# Altium PCB PCB_board3.PcbDoc
Units mil, origin at the board's own origin, x right, y up, seen from the top; angles counter-clockwise.
Board outline 3900 x 3900 mil, 2 copper layers (Top Layer, Bottom Layer); 62 components, 45 nets, 259 pads, 84 vias.
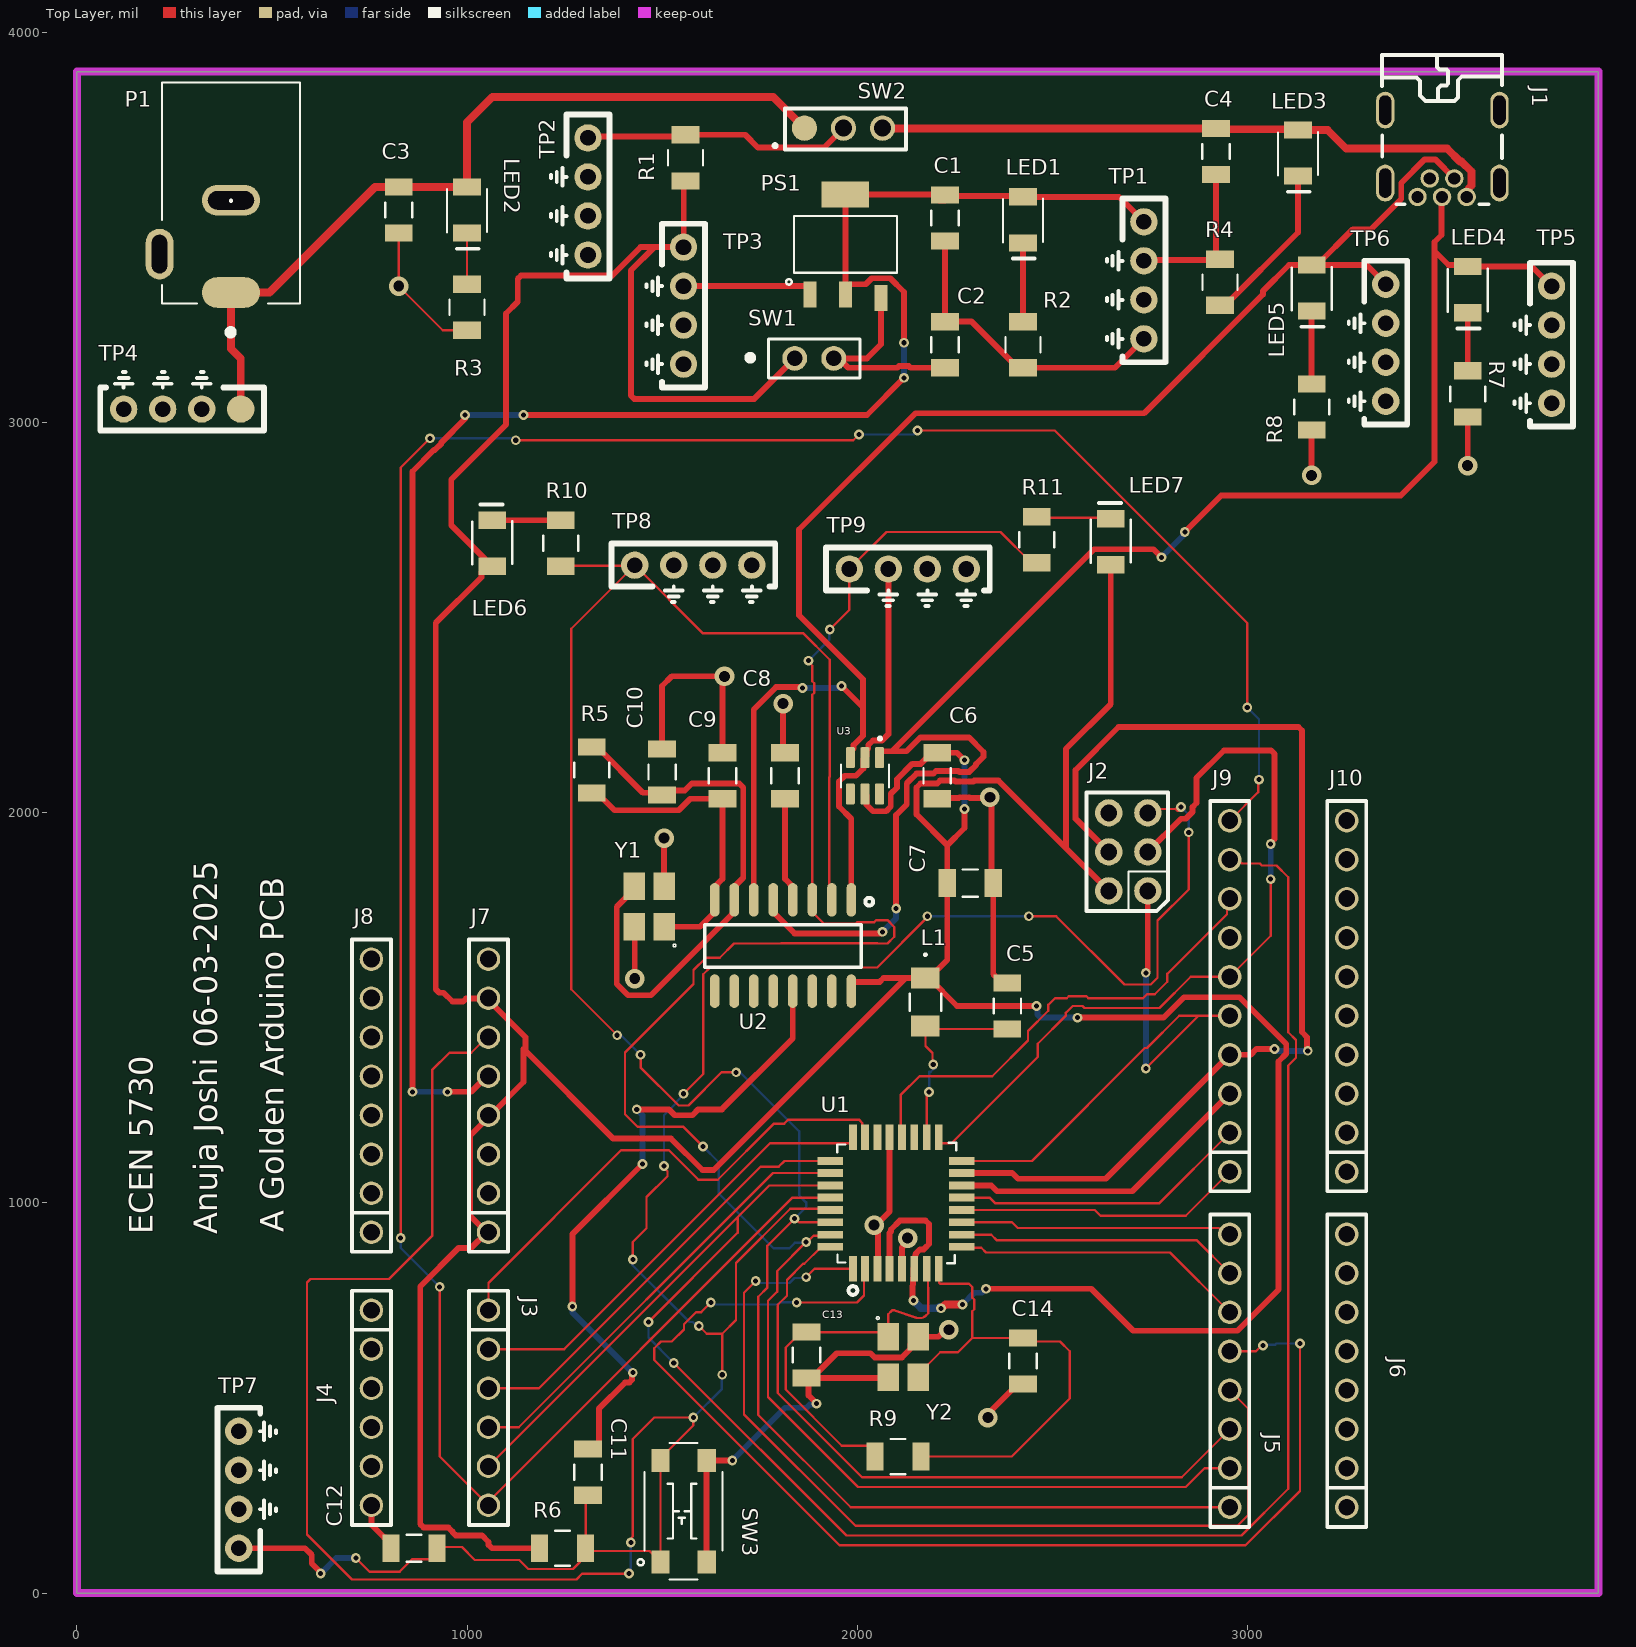
[diagram p0: Top Layer view]
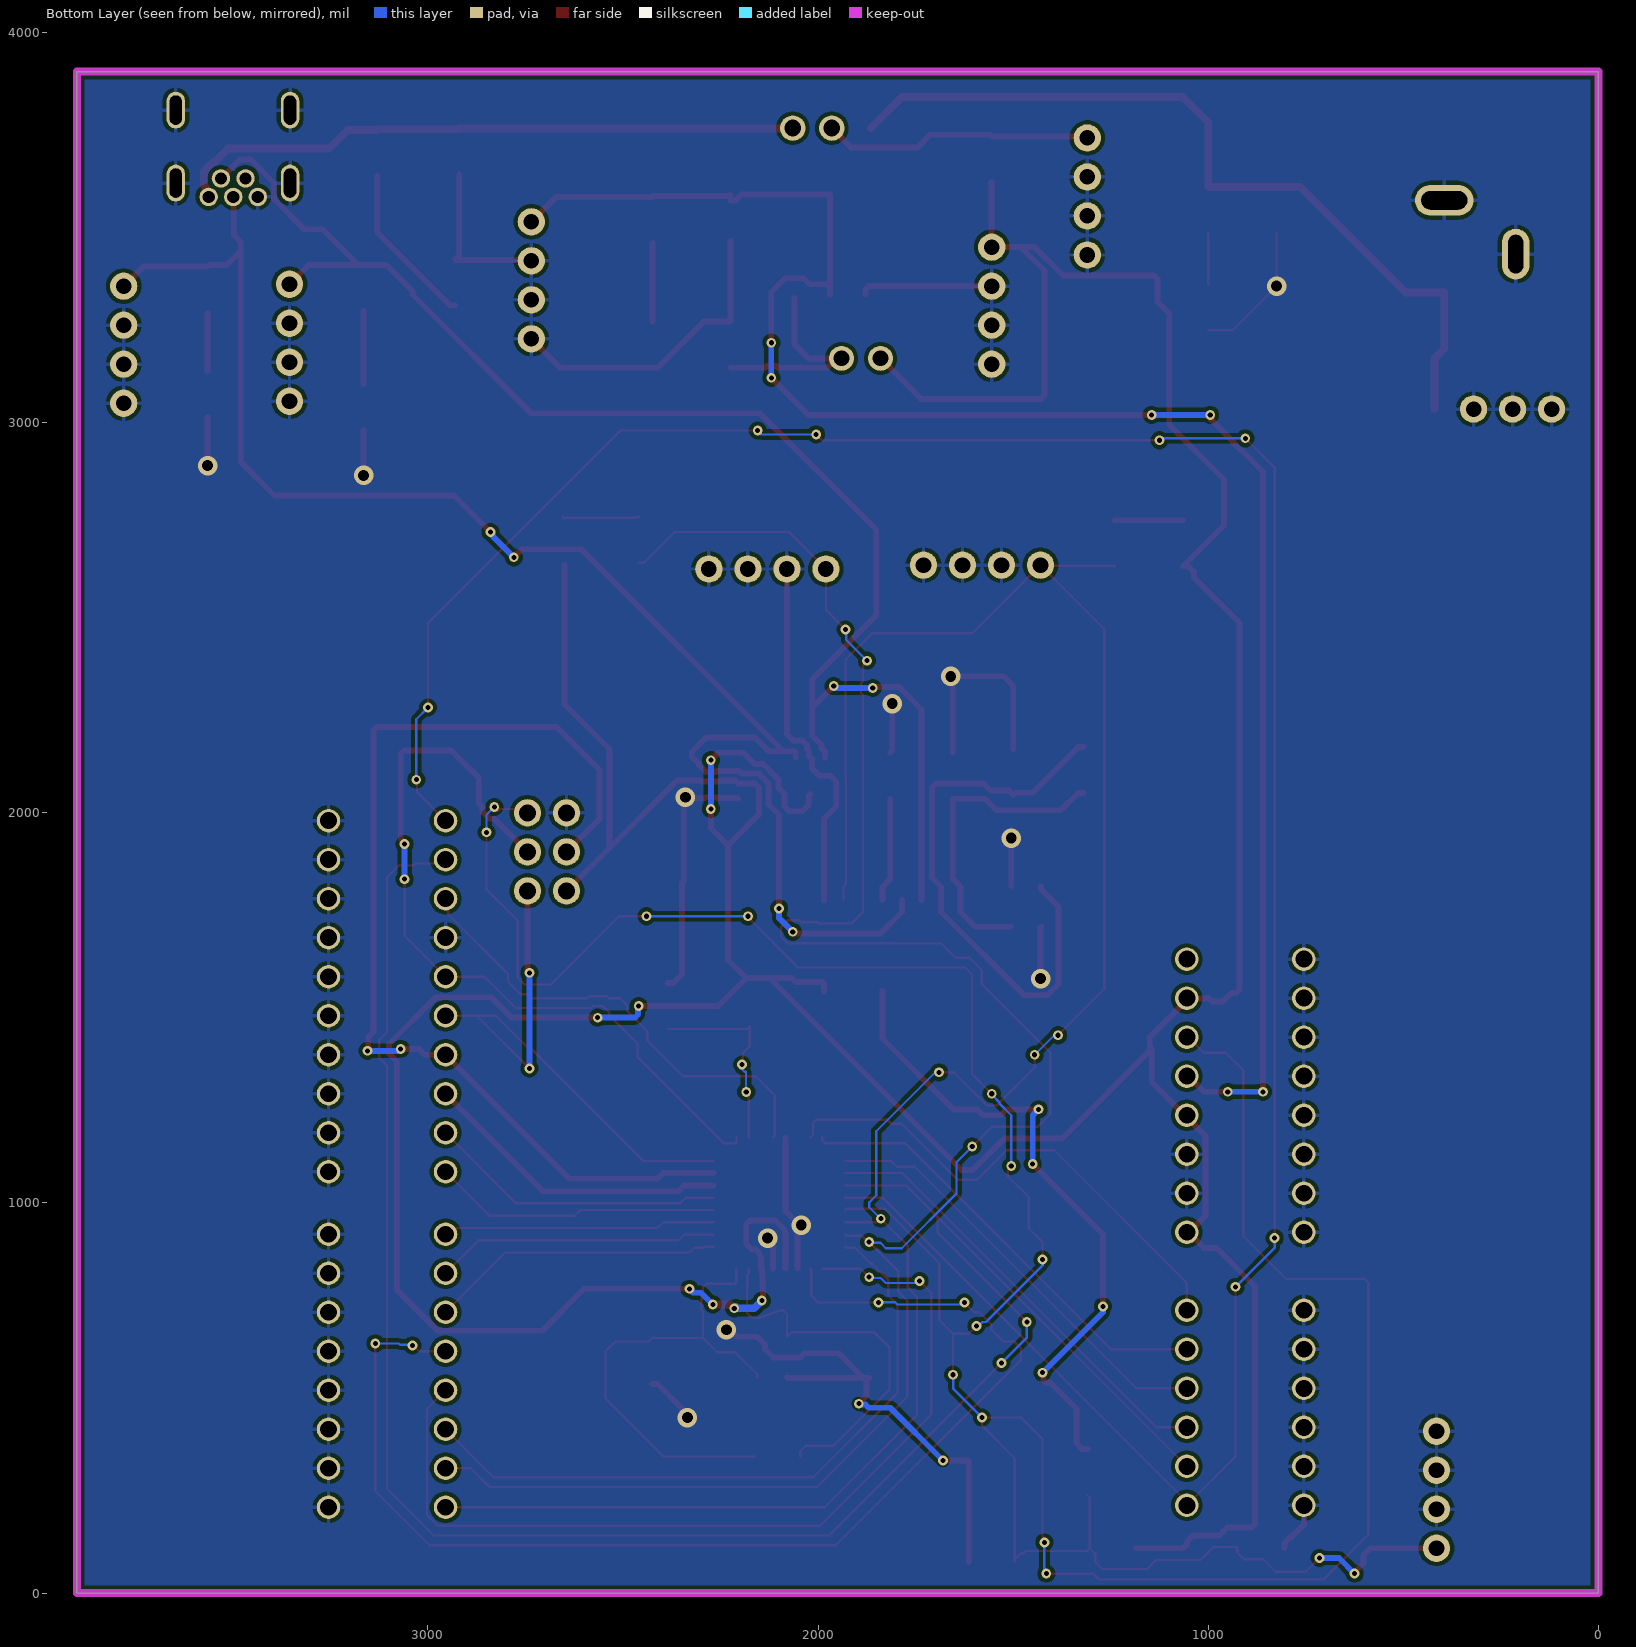
[diagram p1: Bottom Layer view, seen from below]
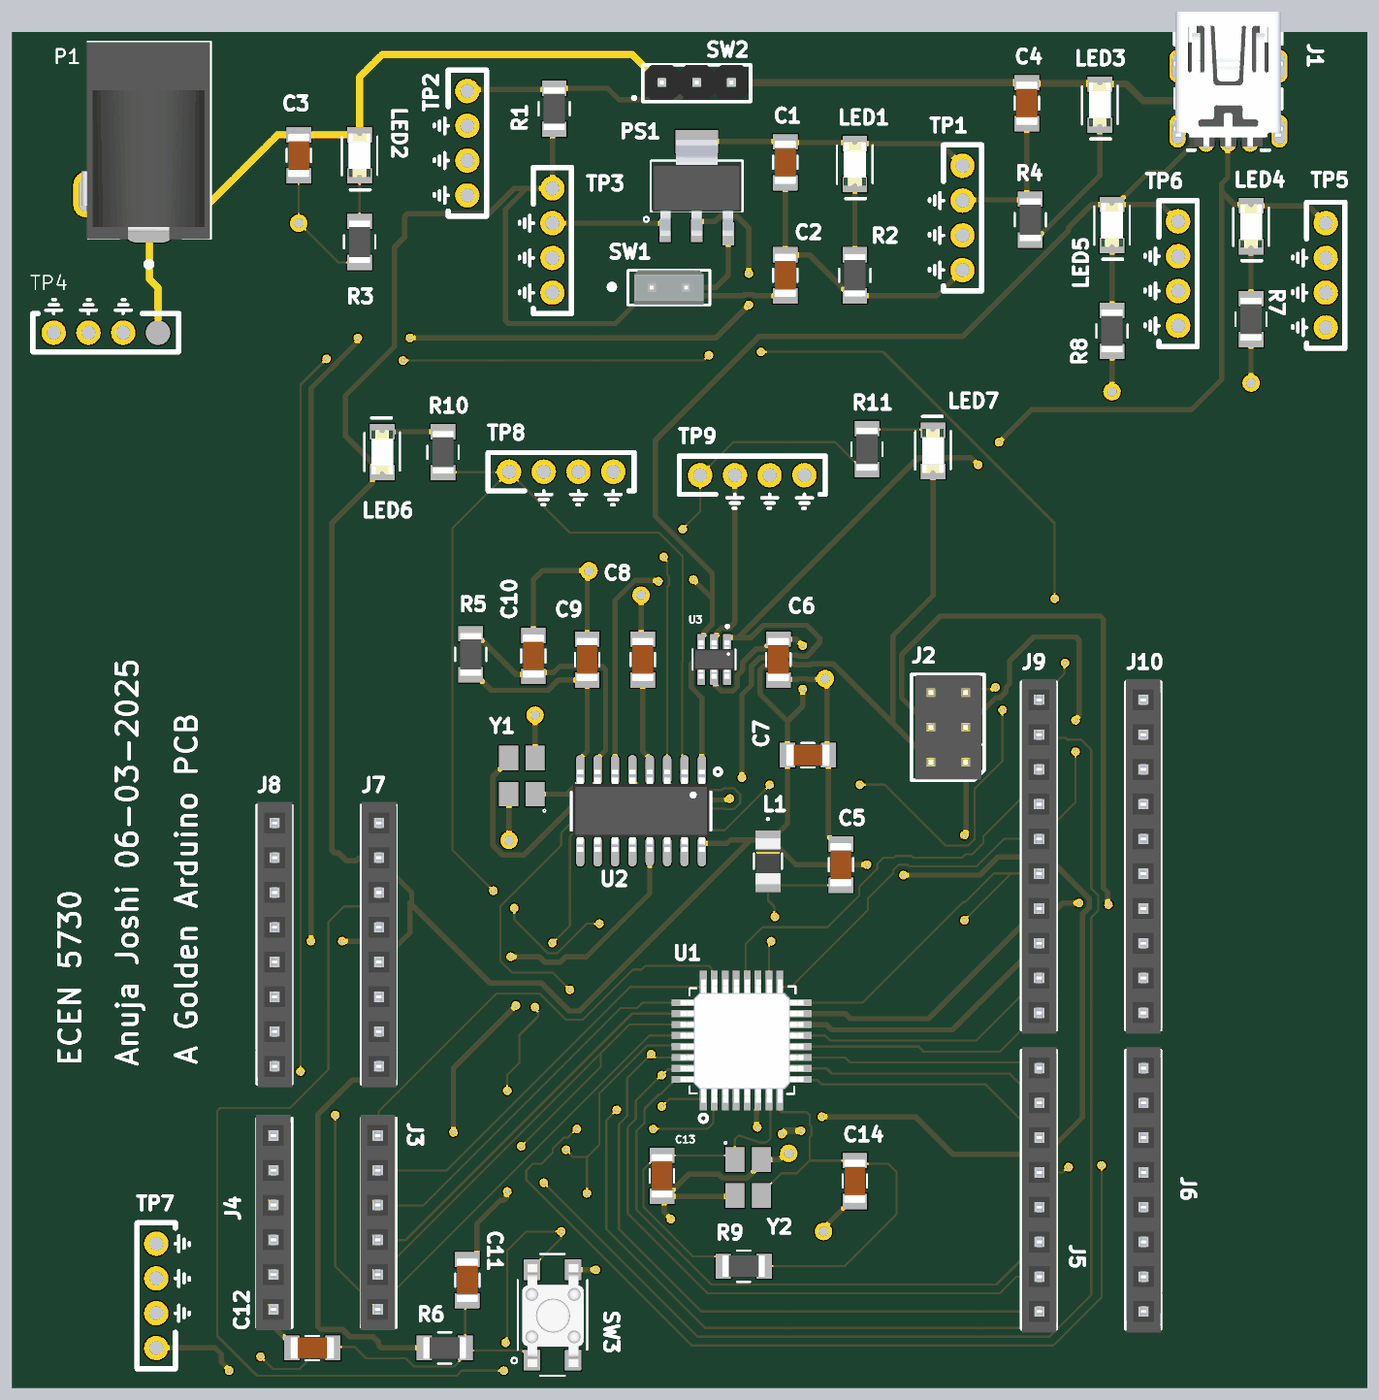
[diagram p2: 3D render of the assembled board from above, using the file's embedded part models]

## Layer stack, top to bottom
Top Solder: solder mask 0.4, Solder Resist, Dk 3.5
Top Layer: signal copper 1.4
Dielectric 1: dielectric 12.6, FR-4, Dk 4.8
Bottom Layer: signal copper 1.4
Bottom Solder: solder mask 0.4, Solder Resist, Dk 3.5

## Board outline
0,0 3900,0 3900,3900 0,3900

## Design rules (kind name [scope] priority, off if disabled: settings)
BoardOutlineClearance [All] p1: gap=10 ignorepadtopadclearanceinfootprint=FALSE except(0: Arc-SplitContinuation Track-SplitContinuation SMDPad-SplitContinuation THPad-SplitContinuation Via-SplitContinuation Fill-SplitContinuation Poly-SplitContinuation Region-SplitContinuation Text-SplitContinuation)
Clearance [All] p1: gap=10 ignorepadtopadclearanceinfootprint=FALSE
PlaneClearance [All] p1: clearance=10
PlaneConnect [All] p1: planeconnectstyle=Direct reliefexpansion=20 reliefentries=4 reliefconductorwidth=10 reliefairgap=10
PolygonConnect [All] p1: thpad.connectstyle=Relief thpad.reliefconductorwidth=10 thpad.reliefentries=4 thpad.polygonreliefangle="90 Angle" thpad.airgapwidth=10 smdpad.connectstyle=Direct smdpad.reliefconductorwidth=10 smdpad.reliefentries=4 smdpad.polygonreliefangle="90 Angle" smdpad.airgapwidth=10 via.connectstyle=Direct via.reliefconductorwidth=10 via.reliefentries=4 via.polygonreliefangle="90 Angle" via.airgapwidth=10
RoutingVias [All] p1: holewidth=13 width=25 viastyle="Through Hole" minholewidth=13 minwidth=25 maxholewidth=60 maxwidth=80
SolderMaskExpansion [All] p1: expansion=4 istentingtop=FALSE
SupplyNets "Schematic Supply Nets_4" [InNet('3.3V')] p1: voltage=0.000
SupplyNets "Schematic Supply Nets_3" [InNet('5V')] p2: voltage=0.000
SupplyNets "Schematic Supply Nets_2" [InNet('5V_USB')] p3: voltage=0.000
SupplyNets "Schematic Supply Nets_1" [InNet('GND')] p4: voltage=0.000
SupplyNets "Schematic Supply Nets" [InNet('5V_power_jack')] p5: voltage=0.000
UnRoutedNet [All] p1: checkbadconnections=TRUE
Width "Schematic Width Constraint_5" [InNet('NetR1_1')] p1: maxlimit=100 minlimit=10 preferedwidth=20 minimp=50.000000 maximp=50.000000 favimp=50.000000
Width "Schematic Width Constraint_4" [InNet('3.3V')] p2: maxlimit=100 minlimit=10 preferedwidth=20 minimp=50.000000 maximp=50.000000 favimp=50.000000
Width "Schematic Width Constraint_3" [InNet('5V_USB')] p3: maxlimit=100 minlimit=10 preferedwidth=20 minimp=50.000000 maximp=50.000000 favimp=50.000000
Width "Schematic Width Constraint_1" [InNet('5V')] p4: maxlimit=100 minlimit=10 preferedwidth=20 minimp=50.000000 maximp=50.000000 favimp=50.000000
Width "Schematic Width Constraint" [InNet('5V_power_jack')] p5: maxlimit=100 minlimit=10 preferedwidth=20 minimp=50.000000 maximp=50.000000 favimp=50.000000
Width [All] p6: maxlimit=100 minlimit=6 preferedwidth=6 minimp=50.000000 maximp=50.000000 favimp=50.000000
27 further rules are at their usual default settings.

## Components (designator, comment, footprint, x,y, rotation, side; value= is the part's Value field where it differs from the comment)
C1 "22uF" 1206_Passive_Capacitor 2225,3525 r90 top
C2 "22uF" 1206_Passive_Capacitor 2225,3200 r270 top
C3 "22uF" 1206_Passive_Capacitor 825,3545 r90 top
C4 "22uF" 1206_Passive_Capacitor 2920,3695 r90 top
C5 "22uF" 1206_Passive_Capacitor 2385,1505 r270 top
C6 "22uF" 1206_Passive_Capacitor 2205,2095 r90 top
C7 "22uF" 1206_Passive_Capacitor 2290,1820 r180 top
C8 "1uF" 1206_Passive_Capacitor 1815,2095 r270 top
C9 "22pF" 1206_Passive_Capacitor 1655,2095 r270 top
C10 "22pF" 1206_Passive_Capacitor 1500,2105 r270 top
C11 "22uF" 1206_Passive_Capacitor 1310,310 r270 top
C12 "1uF" 1206_Passive_Capacitor 864,115 r0 top
C13 "22pF" 1206_Passive_Capacitor 1870,610 r90 top
C14 "22pF" 1206_Passive_Capacitor 2425,595 r90 top
J1 "USB Mini" USB_MINI_B 3500,3690 r180 top value="USB mini B"
J2 "NRPN032PAEN-RC" ICSP 2745,1800 r180 top
J3 "" "6_PIN_100MIL -Female" 1055,725 r270 top value=Female
J4 "" "6_PIN_100MIL -Female" 755,725 r270 top value=Female
J5 "" "8_PIN_100MIL - Female" 2955,220 r90 top value=Female
J6 "" "8_PIN_100MIL - Female" 3255,220 r90 top value=Female
J7 "" "8_PIN_100MIL - Female" 1055,925 r90 top value=Female
J8 "" "8_PIN_100MIL - Female" 755,925 r90 top value=Female
J9 "PPTC101LFBN-RC" "10_PIN_100MIL - Female" 2955,1080 r90 top value=Female
J10 "PPTC101LFBN-RC" "10_PIN_100MIL - Female" 3255,1080 r90 top value=Female
L1 "FB_10uH_1206" AIML-1206_ABR-M 2175,1515 r270 top
LED1 "Blue" LED_1206 2425,3520 r270 top
LED2 "Green" LED_1206 1000,3545 r270 top
LED3 "Blue" LED_1206 3130,3691 r270 top
LED4 "Blue" LED_1206 3565,3341 r270 top
LED5 "Blue" LED_1206 3165,3345 r270 top
LED6 "Blue" LED_1206 1065,2691 r90 top
LED7 "Blue" LED_1206 2650,2695 r90 top
P1 "Power Jack" Power_Jack 395,3333.78 r90 top value="CONN PWR JACK 2X5.5MM SOLDER"
PS1 "AMS1117-3.3" LDO 1970,3457.05 r0 top value="IC REG LINEAR 3.3V 800MA SOT223"
R1 "500m" 1206_Passive_Resitor 1560,3679 r270 top value=500mOhm
R2 "1k" 1206_Passive_Resitor 2425,3200 r90 top value="1K Ohm"
R3 "1k" 1206_Passive_Resitor 1000,3296 r90 top value="1K Ohm"
R4 "1k" 1206_Passive_Resitor 2930,3360 r270 top value="1K Ohm"
R5 "1M" 1206_Passive_Resitor 1320,2110 r90 top value="1M Ohm"
R6 "10k" 1206_Passive_Resitor 1245,115 r180 top value=10KOhm
R7 "1k" 1206_Passive_Resitor 3565,3074 r90 top value="1K Ohm"
R8 "1k" 1206_Passive_Resitor 3165,3040 r90 top value="1K Ohm"
R9 "1M" 1206_Passive_Resitor 2105,350 r0 top value="1M Ohm"
R10 "1k" 1206_Passive_Resitor 1240,2691 r90 top value="1K Ohm"
R11 "1k" 1206_Passive_Resitor 2460,2700 r90 top value="1K Ohm"
SW1 "SW_2Pin_100mil_Switch" 2Pin-Header-Conn 1840,3165 r0 top
SW2 "PREC003SAAN-RC" 3_PIN_100mil 1865,3755 r0 top value="CONN HEADER VERT 3POS 2.54MM"
SW3 "TL3305AF160QG" Switch_JLC 1555,210 r90 top
TP1 "" TP10x_Probe#1 2735,3365 r270 top
TP2 "" TP10x_Probe#1 1310,3580 r270 top
TP3 "" TP10x_Probe#1 1555,3300 r270 top
TP4 "TP_5V" TP10x_Probe#2 270,3035 r180 top
TP5 "10x Probe TP" TP10x_Probe#1 3780,3200 r270 top
TP6 "10x Probe TP" TP10x_Probe#1 3355,3205 r270 top
TP7 "10x Probe TP" TP10x_Probe#1 415,265 r90 top
TP8 "10x Probe TP" TP10x_Probe#1 1580,2635 r0 top
TP9 "10x Probe TP" TP10x_Probe#1 2130,2625 r0 top
U1 "ATMEGA328P-ANR" ATMega328P 2099.25,999.75 r270 top value="IC MCU 8BIT 32KB FLASH 32TQFP"
U2 "CH340G" "USB to serial" 1810,1660 r180 top value="USB to Serial"
U3 "TESD5V0V4UCX6_RFG" SOT95P280X145-6N 2020,2095 r270 top
Y1 "X322512MSB4SI" "Crystal resonator" 1465,1760 r90 top value=12MHz
Y2 "X322516MLB4SI" "Crystal resonator" 2120,605 r270 top value=16MHz

## Footprints (in the part's own frame and the unit in brackets; to place one, negate y for a bottom-side part, rotate by r counter-clockwise, add the part's x,y. Pads: shape width x height; smd on the part's side, far side on the other; paste and mask are expansions set on the pad)
2Pin-Header-Conn [mm]
  round 1.62 hole 1.02: 1(0,0) 2(2.54,0)
  silkscreen extent -3.02,-1.27 4.26,1.26, body extent -1.27,-1.27 3.81,1.27, height 8.13
3_PIN_100mil [mm]
  round 1.65 smd: 1(0,0)
  round 1.65 hole 1.1: 2(2.54,0) 3(5.08,0)
  silkscreen extent -2,-1.4 6.6,1.27, body extent -1.14,-1.27 6.48,1.27, height 8.38
"6_PIN_100MIL -Female" [mil]
  round 60 hole 43.31: 1(0,0) 2(100,0) 3(200,0) 4(300,0) 5(400,0) 6(500,0)
  silkscreen extent -50,-50 550,50, body extent -61,-53 559,47, height 335
"8_PIN_100MIL - Female" [mil]
  round 60 hole 43.31: 1(0,0) 2(100,0) 3(200,0) 4(300,0) 5(400,0) 6(500,0) 7(600,0) 8(700,0)
  silkscreen extent -50,-50 750,50, body extent -60,-51 760,49, height 335
"10_PIN_100MIL - Female" [mil]
  round 60 hole 43.31: 1(0,0) 2(100,0) 3(200,0) 4(300,0) 5(400,0) 6(500,0) 7(600,0) 8(700,0) 9(800,0) 10(900,0)
  silkscreen extent -50,-50 950,50, body extent -61,-50 959,50, height 335
1206_Passive_Capacitor [mil]
  rect 44x71 smd: 1(-59,0) 2(59,0)
  silkscreen extent -19,-35 19,35, body extent -63,-31 63,32, height 50
1206_Passive_Resitor [mil]
  rect 44x71 smd: 1(-59,0) 2(59,0)
  silkscreen extent -19,-45 19,45, body extent -61,-31 61,31, height 26
AIML-1206_ABR-M [mil]
  rect 54x73 smd paste+0 mask+0: 1(-61.5,0) 2(61.5,0)
  silkscreen extent -124,-41 22,41, body extent -66,-36 66,36, height 55
ATMega328P [mm]
  rect 1.65x0.508 smd mask+0.025: 1(4.28,-2.794) 2(4.28,-2.007) 3(4.28,-1.194) 4(4.28,-0.406) 5(4.28,0.406) 6(4.28,1.194) 7(4.28,2.007) 8(4.28,2.794) 17(-4.28,2.794) 18(-4.28,2.007) 19(-4.28,1.194) 20(-4.28,0.406) 21(-4.28,-0.406) 22(-4.28,-1.194) 23(-4.28,-2.007) 24(-4.28,-2.794)
  rect 0.508x1.65 smd mask+0.025: 9(2.843,4.28) 10(2.056,4.28) 11(1.243,4.28) 12(0.455,4.28) 13(-0.357,4.28) 14(-1.145,4.28) 15(-1.958,4.28) 16(-2.745,4.28) 25(-2.745,-4.28) 26(-1.958,-4.28) 27(-1.145,-4.28) 28(-0.357,-4.28) 29(0.455,-4.28) 30(1.243,-4.28) 31(2.056,-4.28) 32(2.843,-4.28)
  silkscreen extent -3.94,-3.81 5.97,3.94, body extent -4.45,-4.47 4.55,4.53, height 1.16
"Crystal resonator" [mm]
  rect 1.8x1.4 smd: 1(-1.32,-1.02) 2(1.32,-1.02) 3(1.32,0.92) 4(-1.32,0.92)
  silkscreen extent -2.63,-1.79 -2.45,-1.61, body extent -1.65,-1.2 1.65,1.2, height 0.8
ICSP [mil]
  round 70 hole 43.31: 1(0,0) 2(0,-100) 3(0,-200) 4(100,0) 5(100,-100) 6(100,-200)
  silkscreen extent -52,-252 157,52, body extent -44,-250 146,50, height 330
LDO [mm]
  rect 0.838x1.7 smd: 1(-2.311,-3.25) 2(0,-3.25) 3(2.311,-3.5)
  rect 3.099x1.7 smd: 4(0,3.25)
  silkscreen extent -3.86,-2.62 3.35,1.85, body extent -3.25,-3.65 3.25,3.35, height 1.85
LED_1206 [mil]
  rect 44x71 smd: 1(-59,0) 2(59,0)
  silkscreen extent -54,-51 99,51, body extent -63,-31 63,31, height 28
Power_Jack [mm]
  oval 2x3.8 smd: 1(0,0)
  oval 2x3.8 hole 1.2 slot 3 at 90 deg: 2(6,0)
  oval 3.3x1.8 hole 1 slot 2.5 at 0 deg: 3(2.5,4.65)
  silkscreen extent -2.79,-4.5 13.68,4.5, body extent -0.76,-4.45 13.64,4.95, height 11.49
SOT95P280X145-6N [mm]
  rrect25% 1.35x0.58 smd: 1(-1.185,0.95) 2(-1.185,0) 3(-1.185,-0.95) 4(1.185,-0.95) 5(1.185,0) 6(1.185,0.95)
  silkscreen extent -2.52,-1.57 0.75,1.57, body extent -1.4,-1.45 1.4,1.45, height 1.45
Switch_JLC [mm]
  rect 1.5x1.2 smd: 1(-3.3,1.5) 2(3.3,1.5) 3(-3.3,-1.5) 4(3.3,-1.5)
  silkscreen extent -4.44,-2.54 4.45,3, body extent -3.8,-2.29 3.7,2.21, height 3.7
TP10x_Probe#1 [mil] "Small Probs footprint"
  round 70 hole 40: 1(-150,0) 2(-50,0) 2(50,0) 2(150,0)
  silkscreen extent -210,-95 210,55
TP10x_Probe#2 [mil] "Small Probs footprint"
  round 70 smd: 1(-150,0)
  round 70 hole 40: 2(-50,0) 2(50,0) 2(150,0)
  silkscreen extent -210,-95 210,55
"USB to serial" [mil]
  oval 24x86.61 smd: 1(-175,-117) 2(-125,-117) 3(-75,-117) 4(-25,-117) 5(25,-117) 6(75,-117) 7(125,-117) 8(175,-117) 9(175,117) 10(125,117) 11(75,117) 12(25,117) 13(-25,117) 14(-75,117) 15(-125,117) 16(-175,117)
  silkscreen extent -231,-122 201,56, body extent -197,-118 197,118, height 71
USB_MINI_B [mm]
  round 1.2 hole 0.8: 1(-1.58,2.826) 2(-0.78,1.622) 3(0.02,2.826) 4(0.82,1.622) 5(1.62,2.826)
  oval 1.2x2.4 hole 0.8 slot 1.9 at 90 deg: 6(-3.72,1.924) 7(3.72,1.924) 8(-3.72,-2.826) 9(3.72,-2.826)
  silkscreen extent -3.89,-6.42 3.93,3.3, body extent -4.04,-6.83 4.06,3.02, height 3.98

## Part data
C1 C2 C3 C4 C5 C6 C7 C11: library part C_22uF_1206, "22uF ±10% 25V X5R 1206 Multilayer Ceramic Capacitors MLCC - SMD/SMT RoHS", LCSC Part#=C12891, MFR Part #=CL31A226KAHNNNE, Datasheet=https://datasheet.lcsc.com/lcsc/1811031514_Samsung-Electro-Mechanics-CL31A226KAHNNNE_C12891.pdf, Type=basic
C8 C12: library part C_1uF_1206, "MULTILAYER CERAMIC CAPACITORS MLCC - SMD/SMT 1UF 50V 1206 ROHS", LCSC Part#=C1848, MFR Part #=CL31B105KBHNNNE, Digikey Link=https://www.digikey.com/product-detail/en/C1206C105M4RACTU/399-8150-1-ND/3471873/?itemSeq=304982366, Type=Basic
C9 C10 C13 C14: library part C_22pF_1206, "22pF ±5% 1kV C0G 1206 Multilayer Ceramic Capacitors MLCC - SMD/SMT RoHS", LCSC Part#=C107174, MFR Part #=CC1206JKNPOCBN220, Datasheet=https://datasheet.lcsc.com/lcsc/1810241219_YAGEO-CC1206JKNPOCBN220_C107174.pdf, Type=Extended
J1: library part J_USB_B_Mini, "Through Hole USB Connectors RoHS", LCSC Part#=C46398, MFR Part #=920-462A2021D10102, Datasheet=https://datasheet.lcsc.com/szlcsc/2103081233_Jing-Extension-of-the-Electronic-Co-920-462A2021D10102_C46398.pdf, Type=Extended
J2: library part J_ICSP, "Connector Header Through Hole 6 position 0.079\" (2.00mm)", LCSC Part#=C124384, Digikey Link=https://www.digikey.com/product-detail/en/NRPN032PAEN-RC/S5801-03-ND/804955/?itemSeq=304982355, MFR Part #=NRPN032PAEN-RC, Type=Extended
J3 J4: library part JF_6_PIN_FEMALE, "6 Position Header Connector 0.100\" (2.54mm) Through Hole Tin", LCSC Part#=C40877, MFR Part #=PPTC061LFBN-RC, Digikey Link=https://www.digikey.com/product-detail/en/PPTC061LFBN-RC/S7004-ND/810145/?itemSeq=304982353, Type=Extended
J5 J6 J7 J8: library part JF_8_PIN_FEMALE, "8 Position Header Connector 0.100\" (2.54mm) Through Hole Tin", LCSC Part#=C27438, MFR Part #=PPTC081LFBN-RC, Digikey Link=https://www.digikey.com/product-detail/en/PPTC081LFBN-RC/S7006-ND/810147/?itemSeq=304982354, Type=Extended
J9 J10: library part JF_10_PIN_FEMALE_, "10 Position Header Connector 0.100\" (2.54mm) Through Hole Tin", LCSC Part#=C225507, Digikey Link=https://www.digikey.com/product-detail/en/PPTC101LFBN-RC/S7008-ND/810149/?itemSeq=304982352, MFR Part #=PPTC101LFBN-RC, Type=Extended
L1: "25mA 10uH ±10% 800mΩ 1206  Inductors (SMD) ROHS", LCSC Part#=C1051, MFR Part #=CMI321609X100KT, Mfr_Name="FH (Guangdong Fenghua Advanced Tech)", Datasheet=https://datasheet.lcsc.com/lcsc/1810311314_FH--Guangdong-Fenghua-Advanced-Tech-CMI321609X100KT_C1051.pdf, Type=Basic
LED1 LED3 LED4 LED5 LED6 LED7: library part LED_BLUE_1206, "blue 1206  Light Emitting Diodes (LED) ROHS", LCSC Part#=C130717, MFR Part #=NCD1206B1, Datasheet=https://datasheet.lcsc.com/lcsc/2008201033_Foshan-NationStar-Optoelectronics-NCD1206B1_C130717.pdf, Type=Extended
LED2: library part LED_GREEN_1206, "Green 513~528nm 1206 Light Emitting Diodes (LED) RoHS", LCSC Part#=C434439, MFR Part #=SZYY1206G, Datasheet=https://datasheet.lcsc.com/lcsc/2006301532_Yongyu-Photoelectric-SZYY1206G_C434439.pdf, Type=Extended
P1: library part "P_Power Jack", "Power Barrel Connector Jack 2.10mm ID (0.083\"), 5.50mm OD (0.217\") Through Hole, Right Angle", LCSC Part#=C136744, MFR Part #=PJ-102A, Digikey Link=https://www.digikey.com/product-detail/en/PJ-102A/CP-102A-ND/275425/?itemSeq=304982367, Type=Extended
PS1: library part PS_AMS_LDO_3v3, "LOW DROPOUT REGULATORS(LDO) POSITIVE FIXED 1.3V @ 800MA 15V 3.3V 1A SOT-223 ROHS", LCSC Part#=C6186, MFR Part #=AMS1117-3.3, Type=Basic
R1: library part R_500mOhm_1206, "Resistors/Shunt 250mW 500mΩ ±800ppm/℃ ±5% 1206  Current Sense  Resistors ROHS", LCSC Part#=C247433, MFR Part #=1206W4J050KT5E, Datasheet=https://datasheet.lcsc.com/lcsc/1810301438_UNI-ROYAL-Uniroyal-Elec-1206W4J050KT5E_C247433.pdf, Type=Extended
R2 R3 R4 R7 R8 R10 R11: library part R_1K_1206, "CHIP RESISTOR - SURFACE MOUNT 1KOHMS ±1% 1/4W 1206 ROHS", LCSC Part#=C4410, MFR Part #=RNCP1206FTD1K00CT, Digikey Link=https://www.digikey.com/product-detail/en/RNCP1206FTD1K00/RNCP1206FTD1K00CT-ND/2240675/?itemSeq=304982373, Type=Basic
R5 R9: library part R_1M_1206, "CHIP RESISTOR - SURFACE MOUNT 1MOHMS ±1% 1/4W 1206 ROHS", LCSC Part#=C17927, MFR Part #=RMCF1206JT1M00, Digikey Link=https://www.digikey.com/product-detail/en/RMCF1206JT1M00/RMCF1206JT1M00CT-ND/1942830/?itemSeq=304982358, Type=Basic
R6: library part R_10KOhm_1206, "10 kOhms ±5% 0.25W, 1/4W Chip Resistor 1206 (3216 Metric) Automotive AEC-Q200 Thick Film", LCSC Part#=C17902, MFR Part #=RMCF1206FT10K0, Digikey Link=https://www.digikey.com/en/products/detail/stackpole-electronics-inc/RMCF1206FT10K0/1759669, Type=Basic
SW1: "2Pin Header", LCSC Part#=C124375, Type=Extended
SW2: library part SW_3Pin_100mil_Switch, "Connector Header Through Hole 3 position 0.100\" (2.54mm)", LCSC Part#=C49257, Digikey Link=https://www.digikey.com/product-detail/en/PREC003SAAN-RC/S1012EC-03-ND/2774851/?itemSeq=304982371, MFR Part #=PREC003SAAN-RC, Type=Extended
SW3: library part SW_Push_Button_JLC, "Tactile Switch SPST-NO Top Actuated Surface Mount", LCSC Part#=C2837550, MFR Part #=KH-4.5X4.5X4.3H-STM, Datasheet=https://datasheet.lcsc.com/lcsc/2106081532_Shenzhen-Kinghelm-Elec-KH-4.5X4.5X4.3H-STM_C2837550.pdf, Type=Extended
TP1 TP2 TP3 TP4 TP5 TP6 TP7 TP8 TP9: library part TP_10x_Probe, "Test Point 300 mil centers"
U1: library part U_ATMega328P, "AVR AVR® ATmega Microcontroller IC 8-Bit 20MHz 32KB (16K x 16) FLASH 32-TQFP (7x7)", LCSC Part#=C14877, MFR Part #=ATMEGA328P-AU, Digikey Link=https://www.digikey.com/product-detail/en/ATMEGA328P-ANR/ATMEGA328P-ANRCT-ND/2774230/?itemSeq=304982365, Type=Basic
U2: library part U_USBtoSerial, "Transceiver USB 2.0 2Mbps SOP-16_150mil USB ICs RoHS", LCSC Part#=C14267, Datasheet=https://datasheet.lcsc.com/lcsc/2008191806_WCH-Jiangsu-Qin-Heng-CH340G_C14267.pdf, MFR Part #=CH340G, Type=Basic
U3: "SOT-26, 5V, 75W, 0.6pF, ESD Protection", Package=None, Check_prices=https://www.snapeda.com/parts/TESD5V0V4UCX6%20RFG/Taiwan+Semiconductor/view-part/?ref=eda, MF="Taiwan Semiconductor", MP="TESD5V0V4UCX6 RFG", SnapEDA_Link=https://www.snapeda.com/parts/TESD5V0V4UCX6%20RFG/Taiwan+Semiconductor/view-part/?ref=snap
Y1: library part X_12MHz_Res, "SMD Crystal Resonators 12MHz ±10ppm SMD-3225_4P RoHS", LCSC Part#=C9002, Datasheet=https://datasheet.lcsc.com/szlcsc/Yangxing-Tech-X322512MSB4SI_C9002.pdf, MFR Part #=X322512MSB4SI, Type=Basic
Y2: library part X_16Mhz_Res, "±10ppm 16000000Hz -40℃~85℃ 贴片无源晶振 60Ω 9pF SMD3225-4P Crystals ROHS", LCSC Part#=C13738, MFR Part #=X322516MLB4SI, Type=Basic

## Via types
v1: diameter 25, hole 13, Top Layer to Bottom Layer, 72 vias
v2: diameter 50, hole 28, Top Layer to Bottom Layer, 12 vias

## Nets (pads, with @x,y where several pads share a name; then routed paths per layer and width w, separated by ;. In a path a pad name is that pad's centre, name@x,y a point inside that pad or via, vN(x,y) a via of type N, cw(c..) or ccw(c..) an arc to the next point about the centre after c; other vN are vias at no path point)
3.3V: C1.2 J7.5 LED1.1 PS1.2 PS1.4 TP1.1 | length 4621.5
  Top Layer w15: v1(860,1285) 860,2875 915,2930 917.43,2930 935,2947.57 935,2950 995,3010 v1(995,3020) ; v1(950,1285) 1010.75,1285 1050.75,1325 J7.5 ; v1(1145,3020) 2025,3020 v1(2120,3115) ; PS1.2 PS1.2@1970,3346.06 ; v1(2120,3205) 2120,3334.97 2084.75,3370.22 2037.25,3370.22 2022.09,3355.06 1979,3355.06 PS1.2@1970,3346.06 ; C1.2@2225,3570 2211.5,3570 2196.5,3585 PS1.4 PS1.2@1970,3346.06 ; C1.2 2227.5,3581.5 2422.5,3581.5 LED1.1 2671,3579 TP1.1
  Bottom Layer w15: v1(860,1285) v1(950,1285) ; v1(995,3020) v1@1147.93,3020 ; v1(2120,3115) v1(2120,3205)
5V: C6.2 C7.2 J2.4 J7.1 J7.4 J7.7 L1.1 LED6.1 LED7.1 R1.2 R6.2 SW1.1 TP3.1 U1.4 U1.6 U2.16 U3.5 | length 12809.1
  Top Layer w15: J7.1 J7.1@1050,925 ; 1150,1395 1150,1425 1055,1520 J7.7 1053.7,1523.7 997.5,1523.7 990,1516.2 962.59,1516.2 940,1538.79 928.79,1538.79 920,1547.57 920,2487 1037,2604 1037,2617.5 1051.5,2632 LED6.1 959.65,2737.35 959.65,2854.71 1100,2995.06 1100,3280 1130,3310 1130,3368.71 1138.79,3377.5 1372.14,3377.5 1444.64,3450 1480,3450 ; R6.2 1063.79,115 1055,123.79 1055,131.21 1038.21,148 971.29,148 962.5,156.79 962.5,157.75 952.25,168 888.79,168 880,176.79 880,786.21 978.79,885 1010.75,885 1050,924.25 J7.1@1050,925 ; TP3.1 1480,3450 ; TP3.1@1555.4,3450.4 R1.2@1555.4,3617.23 ; SW1.1 1736.21,3061.21 1428.79,3061.21 1420,3070 1420,3390 1480,3450 ; U2.16 1985,1562.65 1989.16,1566.81 2058.12,1566.81 2067.81,1576.5 2124.56,1576.5 ; U3.5 2023.92,2044.43 2023.92,2020.76 2040.41,2004.27 2074.4,2004.27 2086.32,2016.2 2086.32,2048.82 2102,2064.5 2102,2085.96 2141.54,2125.5 2163,2125.5 2191.5,2154 C6.2 2256,2154 v1(2275,2135) ; U1.4 2083.25,923 2086.75,926.5 2086.75,932.25 2109.25,954.75 2175.46,954.75 2184.25,945.97 2184.25,894.75 2175.9,886.41 2170.73,881.23 2161,881.23 2150.75,870.98 2146.25,856.75 U1.6 2143.75,831.45 2142.75,791.52 2141.75,785.72 2141.75,752.25 v1(2144.25,749.75) ; v1(2275,2010) 2275,1961.12 2231,1917.12 ; v1(2330,780) 2599.94,780 2707.44,672.5 2974.68,672.5 3080,777.82 3080,1362.57 3100,1382.57 3100,1407.43 2979.93,1527.5 2837.86,1527.5 2785.36,1475 v1(2565,1475) ; v1(2460,1505) 2256,1505 L1.1@2184.5,1576.5 ; J2.4 2535,1910 ; LED7.1 2650,2278.63 2535,2163.63 2535,1910 ; J7.1@1050,925 1007.5,967.5 1007.5,1172.5 1055,1220 J7.4 1060,1225 1145,1310 1145,1395 1375,1165 1522.78,1165 1603.42,1084.37 1632.43,1084.37 2124.56,1576.5 ; 2124.56,1576.5 L1.1 L1.1@2184.5,1576.5 ; L1.1@2184.5,1576.5 2231,1623 C7.2 2231,1917.12 ; 2231,1917.12 2152,1996.12 2152,2065.25 2162.25,2075.5 2205.36,2075.5 2212.36,2082.5 2249.72,2082.5 2252.22,2080 2297.78,2080 2300.28,2082.5 2362.5,2082.5 2535,1910
  Top Layer w20: v1(2215,730.07) 2216.35,730.07 2226.28,740 v1(2270,740)
  Bottom Layer w15: v1(2270,740) 2300,770 2320,770 v1(2330,780) ; v1(2275,2010) v1(2275,2135) ; v1(2460,1505) 2461.91,1503.09 2461.91,1483.09 2470,1475 v1(2565,1475)
  Bottom Layer w20: v1(2144.25,749.75) 2163.93,730.07 v1@2211.36,730.07 ; v1@2211.36,733.7 v1(2215,730.07)
5V_power_jack: C3.2 LED2.1 P1.1 SW2.1 TP4.1 | length 2117.1
  Top Layer w20: TP4.1 420,3164.4 395,3189.4 P1.1 493.78,3333.78 764,3604 C3.2 LED2.1 1000,3770 1065,3835 1785,3835 SW2.1
5V_USB: C4.2 J1.1 LED3.1 SW2.3 | length 1624.3
  Top Layer w20: SW2.3@2066,3754 C4.2 2922,3752 3128,3752 LED3.1 3206.14,3750 3253.64,3702.5 3512.51,3702.5 3545.25,3669.76 3548.78,3669.76 3574.34,3644.2 3574.34,3608.07 3567.42,3601.15 3567.42,3583.96 J1.1
A0: J3.1 U1.23 | length 1307.7
  Top Layer w6: J3.1 1055,795 1395,1135 1517.43,1135 1593.06,1059.37 1642.78,1059.37 1786.9,1203.48 1812.91,1203.48 1823.16,1213.74 2004.63,1213.74 2013.25,1205.12 2013.25,1175.26 U1.23
A1: J3.2 U1.24 | length 1163.8
  Top Layer w6: J3.2 1248.93,625 1777.44,1153.5 1982.25,1153.5 1989.25,1160.5 U1.24
A2: J3.3 U1.25 | length 1117.2
  Top Layer w6: J3.3 1184.29,525 1752.36,1093.07 1798.72,1093.07 1813.47,1107.82 U1.25
A3: J3.4 U1.26 | length 1145.7
  Top Layer w6: J3.4 1132.37,425 1784.2,1076.82 U1.26
A4/SDA: J3.5 J9.9 U1.27 | length 5230.4
  Top Layer w6: J3.5 1694,964 ; v1(1465,695) 1694,924 1694,964 ; v1(1530,590) 1972.5,147.5 2985.03,147.5 3105,267.47 3105,1352.22 3125,1372.22 3125,1417.78 3105,1437.78 3105,1835 3075,1865 3037.22,1865 3032.22,1870 2986.29,1870 2984.9,1871.39 2963.61,1871.39 J9.9 ; U1.27 1774.82,1044.82 1694,964
  Bottom Layer w6: v1(1465,695) 1465,655 v1(1530,590)
A5/SCL: J3.6 J9.10 U1.28 | length 6928.8
  Top Layer w6: v1(830,910) 830,2885 v1(905,2960) ; v1(930,785) 930,350 J3.6 1055,234.19 1834.63,1013.82 U1.28 ; v1(1125,2955) 1990,2955 v1(2005,2970) ; v1(2155,2980) 2506.25,2980 3000,2486.25 v1(3000,2270) ; J9.10 3028.09,2053.09 3028.09,2083.09 v1(3030,2085)
  Bottom Layer w6: v1(830,910) 830,885 v1(930,785) ; v1(905,2960) 1120,2960 v1(1125,2955) ; v1(2005,2970) 2145,2970 v1(2155,2980) ; v1(3000,2270) 3030,2240 v1(3030,2085)
AREF: J9.8 U1.20 | length 1219.7
  Top Layer w6: U1.20 2111.5,1172.01 2111.5,1276.5 2160,1325 2346.25,1325 2438,1416.75 2438,1440.57 2490,1492.57 2490,1507.71 2507.29,1525 2537.22,1525 2542.22,1530 2587.78,1530 2592.78,1525 2732.82,1525 2742.82,1535 2762.78,1535 2795,1567.22 2795,1587.18 2947.88,1740.05 2947.88,1772.88 J9.8
CH_XTAL1: C9.2 R5.1 U2.8 Y1.1 | length 809.7
  Top Layer w15: R5.1 1333.5,2051 1378,2006.5 1542.75,2006.5 1572.25,2036 C9.2 1655,1830.74 1635,1810.74 U2.8 1635,1745.69 1597.34,1708.03 Y1.1
CH_XTAL2: C10.2 R5.2 U2.7 Y1.3 | length 1455.4
  Top Layer w15: R5.2 1333.5,2169 1450.79,2051.71 1494.29,2051.71 C10.2 1511.11,2057.11 1558,2057.11 1576.39,2075.5 1697.75,2075.5 1708,2065.25 1708,1833.74 1685,1810.74 U2.7 1685,1745.69 1471.81,1532.5 1412.4,1532.5 1383.72,1561.18 1383.72,1759.04 1428.78,1804.09 Y1.3
D2: J5.3 U1.32 | length 1744.3
  Top Layer w6: U1.32 1928.25,885.32 1905.77,885.32 1864.57,844.13 1861.2,844.13 1820,802.93 1820,762.43 1796.5,738.93 1796.5,513.26 2012.76,297 2832,297 J5.3
D3: J5.4 U1.1 | length 2382.4
  Top Layer w6: v1(1740,800) 1710,770 1710,458.08 1995.58,172.5 2974.68,172.5 3002.5,200.32 3002.5,472.5 J5.4 ; v1(1869.25,809.75) 1890.75,831.25 U1.1
  Bottom Layer w6: v1(1740,800) 1745,795 1826.75,795 1839.59,807.84 1867.34,807.84 v1(1869.25,809.75)
D4: J5.5 U1.2 | length 3181.3
  Top Layer w6: v1(1625,745) 1600.13,720.13 1587.2,720.13 1556.1,689.03 1556.1,676.1 1525,645 1497.57,645 1480,627.43 1480,597.57 1955.07,122.5 2995.39,122.5 3135,262.11 v1(3135,640) ; v1(1845,745) 2000,745 2017.75,762.75 2017.75,828.75 U1.2 ; J5.5 3022.29,620 3037.29,635 v1(3040,635)
  Bottom Layer w6: v1(1625,745) 1630,740 1796.75,740 1802.5,745.75 1844.25,745.75 v1(1845,745) ; v1(3040,635) 3041.91,636.91 3071.91,636.91 3075,640 v1(3135,640)
D5: J5.6 U1.9 | length 756.8
  Top Layer w6: U1.9 2290.23,887.82 2292.73,885.32 2317.98,885.32 2330.23,873.07 2801.93,873.07 J5.6
D6: J5.7 U1.10 | length 728.2
  Top Layer w6: U1.10 2343.6,918.82 2358.35,904.07 2870.93,904.07 J5.7
D7: J5.8 U1.11 | length 700
  Top Layer w6: U1.11 2396.83,950.82 2411.58,936.07 2926.75,936.07 2942.82,920 J5.8
D8: J9.1 U1.12 | length 740.1
  Top Layer w6: U1.12 2608.98,981.82 2623.73,967.07 2842.07,967.07 J9.1
D9: J9.2 U1.13 | length 768.3
  Top Layer w6: U1.13 2339.52,1013.82 2354.27,999.07 2774.07,999.07 J9.2
D10: J9.3 U1.14 | length 796.9
  Top Layer w15: U1.14 2343.74,1044.82 2358.5,1030.07 2705.07,1030.07 J9.3
D11/MOSI: J2.5 J9.4 U1.15 | length 2735.2
  Top Layer w15: U1.15 2397.36,1076.82 2412.11,1062.07 2637.07,1062.07 J9.4 3008.78,1380 3023.78,1395 v1(3070,1395) ; J2.5 2560,1985 2560,2110 2670,2220 3131.21,2220 3140,2211.21 3140,1438.14 3153.14,1425 3153.14,1391.86 v1(3155,1390)
  Bottom Layer w15: v1(3070,1395) 3075,1390 v1(3155,1390)
D12/MISO: J2.1 J9.5 U1.16 | length 1489.4
  Top Layer w6: U1.16 2447.82,1107.82 2737.41,1397.41 2743.12,1397.41 2825.71,1480 2875,1480 ; v1(2740,1345) 2875,1480 ; J9.5 2875,1480
  Top Layer w15: v1(2740,1590) 2745,1595 J2.1
  Bottom Layer w15: v1(2740,1345) v1(2740,1590)
D13/SCK: J2.2 J9.6 U1.17 | length 2065.5
  Top Layer w6: U1.17 2209.25,1154.25 2210,1153.5 2242.5,1153.5 2463,1374 2463,1408.36 2535,1480.36 2535,1487.43 2552.57,1505 2577.43,1505 2582.43,1500 2775,1500 2855,1580 J9.6 3060,1685 v1(3060,1830)
  Top Layer w15: J2.2 2830,1985 2842.43,1985 2860,2002.57 2860,2015 2870,2025 2870,2089.64 2940.36,2160 3061.21,2160 3070,2151.21 3070,1932.71 3060,1922.71 v1(3060,1920)
  Bottom Layer w15: v1(3060,1830) v1(3060,1920)
D+: J1.3 LED4.1 TP5.1 U2.5 U3.1 | length 4028.6
  Top Layer w15: U2.5 1785,1745.69 1839.5,1691.19 2061.19,1691.19 v1(2065,1695) ; U3.1 U3.1@2057.4,2155.65 ; U3.1@2061.32,2157.87 2091.32,2157.87 2126.63,2157.87 2162.25,2193.5 2286.5,2193.5 2323.79,2156.21 2323.79,2143.79 2305,2125 2305,2122.57 2287.43,2105 2262.57,2105 2260.07,2107.5 2202,2107.5 2195,2100.5 2151.9,2100.5 2127,2075.6 2127,2021.52 2100,1994.52 v1(2100,1755) ; 2091.32,2159.57 2607.25,2675.5 2759.5,2675.5 v1(2780,2655) ; v1(2840,2720) 2933.46,2813.46 3393.46,2813.46 3480,2900 3480,3440 ; J1.3 3497.76,3577.29 3497.76,3480.9 3480,3463.14 3480,3440 ; TP5.1 3730,3400 LED4.1 3560.79,3404.21 3515.79,3404.21 3480,3440
  Bottom Layer w15: v1(2065,1695) 2100,1730 v1(2100,1755) ; v1(2780,2655) 2835,2710 2835,2715 v1(2840,2720)
D-: J1.2 LED5.1 TP6.1 U2.6 U3.3 | length 3801.9
  Top Layer w15: U2.6 1735,2265.1 1792.4,2322.5 1857.5,2322.5 v1(1860,2320) ; v1(1960,2325) 2014.93,2270.07 ; U3.3 1982.6,2156.81 1991.08,2165.3 1991.08,2173.8 2015,2197.72 2015,2270.07 2015,2342.57 1851.21,2506.36 1851.21,2726.21 2149.31,3024.31 2735.56,3024.31 3039.87,3328.63 3039.87,3336.87 3107,3404 LED5.1 LED5.1@3178.5,3404 ; TP6.1 3306,3404 LED5.1@3178.5,3404 ; J1.2 3481.85,3675 3455,3675 3394.67,3614.67 3394.67,3573.59 3317.12,3496.05 3270.55,3496.05 LED5.1@3178.5,3404
  Bottom Layer w15: v1(1860,2320) 1952.29,2320 1957.29,2325 v1(1960,2325)
DTR: C11.1 U2.13 | length 1686.9
  Top Layer w15: v1(1270,735) 1270,920 v1(1450,1100) ; C11.1 1323.5,369 1338,383.5 1338,472.64 1405.36,540 1416.21,540 1423.09,546.87 1423.09,563.09 v1(1425,565) ; v1(1435,1240) 1517.22,1240 1532.22,1225 1577.78,1225 1592.78,1240 1653.31,1240 1835,1421.69 U2.13
  Bottom Layer w15: v1(1270,735) 1270,720 v1(1425,565) ; v1(1435,1240) 1450,1225 v1(1450,1100)
GND: C1.1 C2.1 C3.1 C4.1 C5.1 C6.1 C7.1 C8.1 C9.1 C10.1 C12.1 C13.1 C14.1 J1.5 J1.6 J1.7 J1.8 J1.9 J2.6 J4.1 J4.2 J4.3 J4.4 J4.5 J4.6 J6.1 J6.2 J6.3 J6.4 J6.5 J6.6 J6.7 J6.8 J7.2 J7.3 J8.1 J8.2 J8.3 J8.4 J8.5 J8.6 J8.7 J8.8 J9.7 J10.1 J10.2 J10.3 J10.4 J10.5 J10.6 J10.7 J10.8 J10.9 J10.10 P1.2 P1.3 PS1.1 R2.1 R3.1 R4.1 R7.1 R8.1 SW3.3 SW3.4 TP1.2 TP2.2 TP3.2 TP4.2 TP5.2 TP6.2 TP7.2 TP8.2 TP9.2 U1.3 U1.5 U1.21 U2.1 U3.2 Y1.2 Y1.4 Y2.2 Y2.4 | length 6672.9
  Top Layer w6: C3.1 v2(825,3350) 938,3237 R3.1
  Top Layer w15: J4.6 755,175 787,143 790.5,143 805,128.5 C12.1 ; Y1.4 1430,1706.81 v2(1430,1575) ; C10.1 1500,2325 1525,2350 v2(1660,2350) 1655,2345 C9.1 ; v2(1505,1935) 1505,1812.13 Y1.2 ; TP3.2@1555,3350 1870,3350 1879,3341 PS1.1 ; SW3.3 SW3.4 1679.92,339.92 v1(1680,340) ; v2(1810,2280) 1810,2159 C8.1 ; v1(1895.59,485.59) 1895.59,486.5 1875.59,506.5 1875.59,545.41 C13.1 C13.1@1883.5,551 ; U2.1 1985,1984.88 1953.68,2016.19 1953.68,2080.5 1968.18,2095 1997.01,2095 2016.08,2114.07 2016.08,2137.74 U3.2 2023.92,2145.57 2023.92,2160.73 2028.48,2165.3 2028.48,2173.8 2040.41,2185.73 2064.07,2185.73 2080,2201.65 TP9.2@2080,2625 ; v2(2043.29,943.15) 2054.1,943.15 v2@2054.25,943 ; U1.3 2053.25,832.25 2053.25,938.75 2054.25,939.75 2054.25,948.93 2083.25,977.93 U1.21 ; Y2.2 2077.81,551 C13.1@1883.5,551 ; U1.5 2115.25,886.28 2129.25,900.28 v2(2129.25,909.75) ; C6.1 2207,2038 2260.57,2038 2262.57,2040 2287.43,2040 2289.43,2038 2338,2038 v2(2340,2040) 2344.5,2035.5 2344.5,1824.5 C7.1 2349,1586.5 2371.5,1564 C5.1 ; C1.1 C2.1 2293.5,3259 2411.5,3141 R2.1 2661,3141 TP1.2@2735,3215 ; v2(2235,675) 2226.74,675 2208.71,656.97 Y2.4 2136.16,636.91 2136.16,625.55 2114.65,604.04 2045.03,604.04 2034.07,615 1947.5,615 C13.1@1883.5,551 ; v2(2335,450) 2341.7,456.7 2341.7,466.2 2411.5,536 C14.1 ; TP1.2@2735,3415 2737,3417 2928,3417 R4.1 2920,3429 C4.1 ; v2(3165,2865) R8.1 ; v2@3560,2890 v2(3565,2890) R7.1
  Bottom Layer w15: v1(1680,340) 1815,475 1870,475 1878.68,483.68 1893.68,483.68 v1(1895.59,485.59)
MCU_RESET: C11.2 C12.2 J2.3 J7.6 R6.1 SW3.1 SW3.2 TP7.1 U1.29 | length 8577.4
  Top Layer w6: v1(715,90) 750,55 827.25,55 859.25,87 908.5,87 926.14,104.64 926.14,118.14 986.86,118.14 1020,85 1133.75,85 1156.75,62 1271.93,62 1289.5,79.57 1289.5,100.5 R6.1 ; J7.6 1050.75,1425 1010.75,1385 955,1385 910.53,1340.53 910.53,915.53 800,805 598.79,805 590,796.21 590,150 705,35 1280.28,35 1295.28,50 v1(1415,50) ; C11.2 1304,245 R6.1 ; v1(1420,130) 1420,140 1425,145 1425,395 1480,450 v1(1580,450) 1580,429.88 1495.94,345.83 SW3.2 SW3.1@1495.94,85.98 ; v1(1425,855) 1425,900 1460,935 1460,1015 1513.79,1068.79 1513.79,1081.21 1506.91,1088.09 1506.91,1093.09 v1(1505,1095) ; SW3.1 SW3.1@1495.94,85.98 ; v1(1555,1280) 1605.5,1330.5 1605.5,1586.53 1622.78,1603.81 2051.59,1603.81 2178.09,1730.3 2178.09,1733.09 v1(2180,1735) ; v1(1594.25,684.75) 1614.25,664.75 1654.25,664.75 ; v1(1654.25,559.75) 1654.25,664.75 ; U1.29 1927.32,985.25 1828.69,985.25 1689.5,846.07 1689.5,700 1654.25,664.75 ; v1(2440,1735) 2510.07,1735 2685.07,1560 2752.43,1560 2770,1577.57 2770,1723.79 2850,1803.79 v1(2850,1950) ; J2.3@2755,2010 v1@2822.29,2010 ; R6.1 1310.92,108.08 1467.94,108.08 1473.92,102.11 1479.82,102.11 SW3.1@1495.94,85.98
  Top Layer w15: TP7.1 585,115 601.87,98.13 601.87,75.83 625,52.71 v1(625,50) ; J2.3 J2.3@2755,2010 ; v1@2822.29,2010 2827.29,2015 v1(2830,2015)
  Bottom Layer w6: v1(1415,50) 1420,55 v1(1420,130) ; v1(1425,855) 1423.71,853.71 1423.71,841.29 1569.92,695.08 1578.79,695.08 1589.11,684.75 v1(1594.25,684.75) ; v1(1505,1095) 1505,1225 1535,1255 1535,1257.29 1555,1277.29 v1(1555,1280) ; v1(1580,450) 1653.37,523.37 1653.37,558.88 v1(1654.25,559.75) ; v1(2180,1735) v1(2440,1735) ; v1(2830,2015) 2850,1995 v1(2850,1950)
  Bottom Layer w15: v1(625,50) 665,90 v1(715,90)
MCU_RX: J5.1 R10.1 TP8.1 U1.30 U2.2 | length 5574.3
  Top Layer w6: R10.1 1241.5,2633.5 TP8.1@1428.5,2633.5 ; v1(1385,1430) 1267,1548 1267,2472 TP8.1@1428.5,2633.5 ; v1(1445,1380) 1445,1347.57 1542.57,1250 1567.43,1250 1652.43,1335 v1(1690,1335) ; U1.30 1850.89,950.82 1841.96,959.75 v1(1839.25,959.75) 1770,890.5 1770,783.14 1746.5,759.64 1746.5,456.93 1983.43,220 J5.1 ; U2.2 1935,1810.74 1928.68,1817.06 1928.68,2090.85 1930,2092.17 1930,2392.22 1862.22,2460 1605,2460 TP8.1 TP8.1@1428.5,2633.5
  Bottom Layer w6: v1(1385,1430) 1395,1430 v1(1445,1380) ; v1(1690,1335) 1700,1335 1851.21,1183.79 1851.21,1019.63 1869.21,1001.64 1869.21,989.21 1839.75,959.75 v1(1839.25,959.75)
MCU_TX: J5.2 R11.1 TP9.1 U1.31 U2.3 | length 5199.7
  Top Layer w6: v1(1605,1145) 1555,1195 1437.57,1195 1405,1227.57 1405,1386.03 1580.5,1561.53 1580.5,1596.88 1612.43,1628.81 1647.78,1628.81 1684.22,1665.25 1804.56,1665.25 1805.5,1666.19 2051.38,1666.19 2052.57,1665 2077.43,1665 2095,1682.57 2095,1707.43 2077.43,1725 2048.79,1725 2043.79,1720 2001.03,1720 1997.22,1716.19 1914.5,1716.19 1885,1745.69 1885,2302.57 1890,2307.57 1890,2332.43 1885,2337.43 1885,2377.29 1875,2387.29 v1(1875,2390) ; v1(1930,2470) 1980,2520 TP9.1 2075,2720 2367.5,2720 2446.5,2641 R11.1 ; U1.31 1928.25,916.32 1888.53,916.32 1871.96,899.75 v1(1869.25,899.75) 1795,825.5 1795,772.78 1771.5,749.28 1771.5,502.9 2002.4,272 2842.36,272 2890.36,320 J5.2
  Bottom Layer w6: v1(1605,1145) 1645.37,1104.63 1645.37,1024.63 1785.76,884.24 1826.75,884.24 1840.35,897.84 1867.34,897.84 v1(1869.25,899.75) ; v1(1875,2390) 1928.09,2443.09 1928.09,2468.09 v1(1930,2470)
MCU_XTAL1: C13.2 R9.1 U1.7 Y2.1 | length 987.8
  Top Layer w6: R9.1 2046,363.5 2031.5,378 1960.75,378 1817,521.75 1817,629.5 1856.5,669 C13.2 2067.81,669 Y2.1 2079.84,714.9 2088.18,723.24 2089.94,725 2094.88,725 2151.57,705.87 ccw(c2159.52,729.31) 2153.11,705.4 2165.92,705.4 ccw(c2159.52,729.31) 2175,710 2182.5,717.5 2182.5,782.73 2181.5,783.73 2181.5,814 2179,816.5 2178.25,817.25 U1.7
MCU_XTAL2: C14.2 R9.2 U1.8 Y2.3 | length 1273.2
  Top Layer w6: Y2.3 2156.22,560.91 2212.8,617.48 2258.48,617.48 2295,654 ; R9.2 2396.06,350 2536.06,490 2536.21,490 2545,498.79 2545,620 2520,645 2434,645 C14.2 2295,654 ; U1.8 2210,830.5 2210,795.91 2212.5,793.41 2286.21,793.41 2295,784.62 2295,757.43 2300,752.43 2300,727.57 2295,722.57 2295,654
NetC2_2: C2.2 PS1.3 SW1.2 | length 539.2
  Top Layer w15: SW1.2 SW1.2@1953.2,3165 ; PS1.3 2061,3201 2025,3165 SW1.2@1953.2,3165 ; C2.2 2136.43,3141 2132.43,3145 2107.57,3145 2103.57,3141 1977.2,3141 SW1.2@1953.2,3165
NetC5_2: C5.2 L1.2 U1.18 | length 509.3
  Top Layer w6: U1.18 2178.25,1278.75 v1(2184.25,1284.75) ; v1(2195,1355) 2193.09,1356.91 2193.09,1384.62 2175,1402.71 L1.2 2182.5,1446 C5.2
  Bottom Layer w6: v1(2184.25,1284.75) 2185,1285.5 2185,1336.21 2188.51,1336.21 2197.29,1345 v1@2200,1345
NetC8_2: C8.2 U2.4 | length 267.3
  Top Layer w15: C8.2 1815,1830.74 1835,1810.74 U2.4
NetLED1_2: LED1.2 R2.2 | length 202
  Top Layer w15: R2.2 LED1.2
NetLED2_2: LED2.2 R3.2 | length 131
  Top Layer w6: R3.2 LED2.2
NetLED3_2: LED3.2 R4.2 | length 421.8
  Top Layer w15: R4.2 2943.5,3301 3130,3487.5 LED3.2
NetLED4_2: LED4.2 R7.2 | length 149
  Top Layer w15: R7.2 LED4.2
NetLED5_2: LED5.2 R8.2 | length 187
  Top Layer w15: R8.2 LED5.2
NetLED6_2: LED6.2 R10.2 | length 175
  Top Layer w15: LED6.2 R10.2
NetLED7_2: LED7.2 R11.2 | length 199.1
  Top Layer w6: R11.2 2462.5,2756.5 2647.5,2756.5 LED7.2 LED7.2@2655,2759
NetR1_1: R1.1 SW2.2 TP2.1 | length 692.7
  Top Layer w15: TP2.1 1314,3734 1556,3734 R1.1 1713.11,3738 1746.09,3705.02 1915.02,3705.02 SW2.2
pads on no net: J1.4 J7.8 U1.19 U1.22 U2.9 U2.10 U2.11 U2.12 U2.14 U2.15 U3.4 U3.6

## Polygon pours and split planes (outlines as drawn)
GND on Bottom Layer "GND_L02_P000" (solid, pour order 0): 0,3895 10,3885 10,5 3880,5 3890,15 3890,3900

## Keep-outs
Keep-Out Layer:
  the board outline again, w20

## Silkscreen, mask and mechanical layers (free items; w line width, h text height)
Top Overlay:
  text "A Golden Arduino PCB" at 530,925 h60 r90
  text "ECEN 5730" at 195,920 h60 r90
  text "Anuja Joshi 06-03-2025" at 360.01,920 h60 r90